# EAGLE board ControlBoard_V1.2 (EAGLE 6.2)
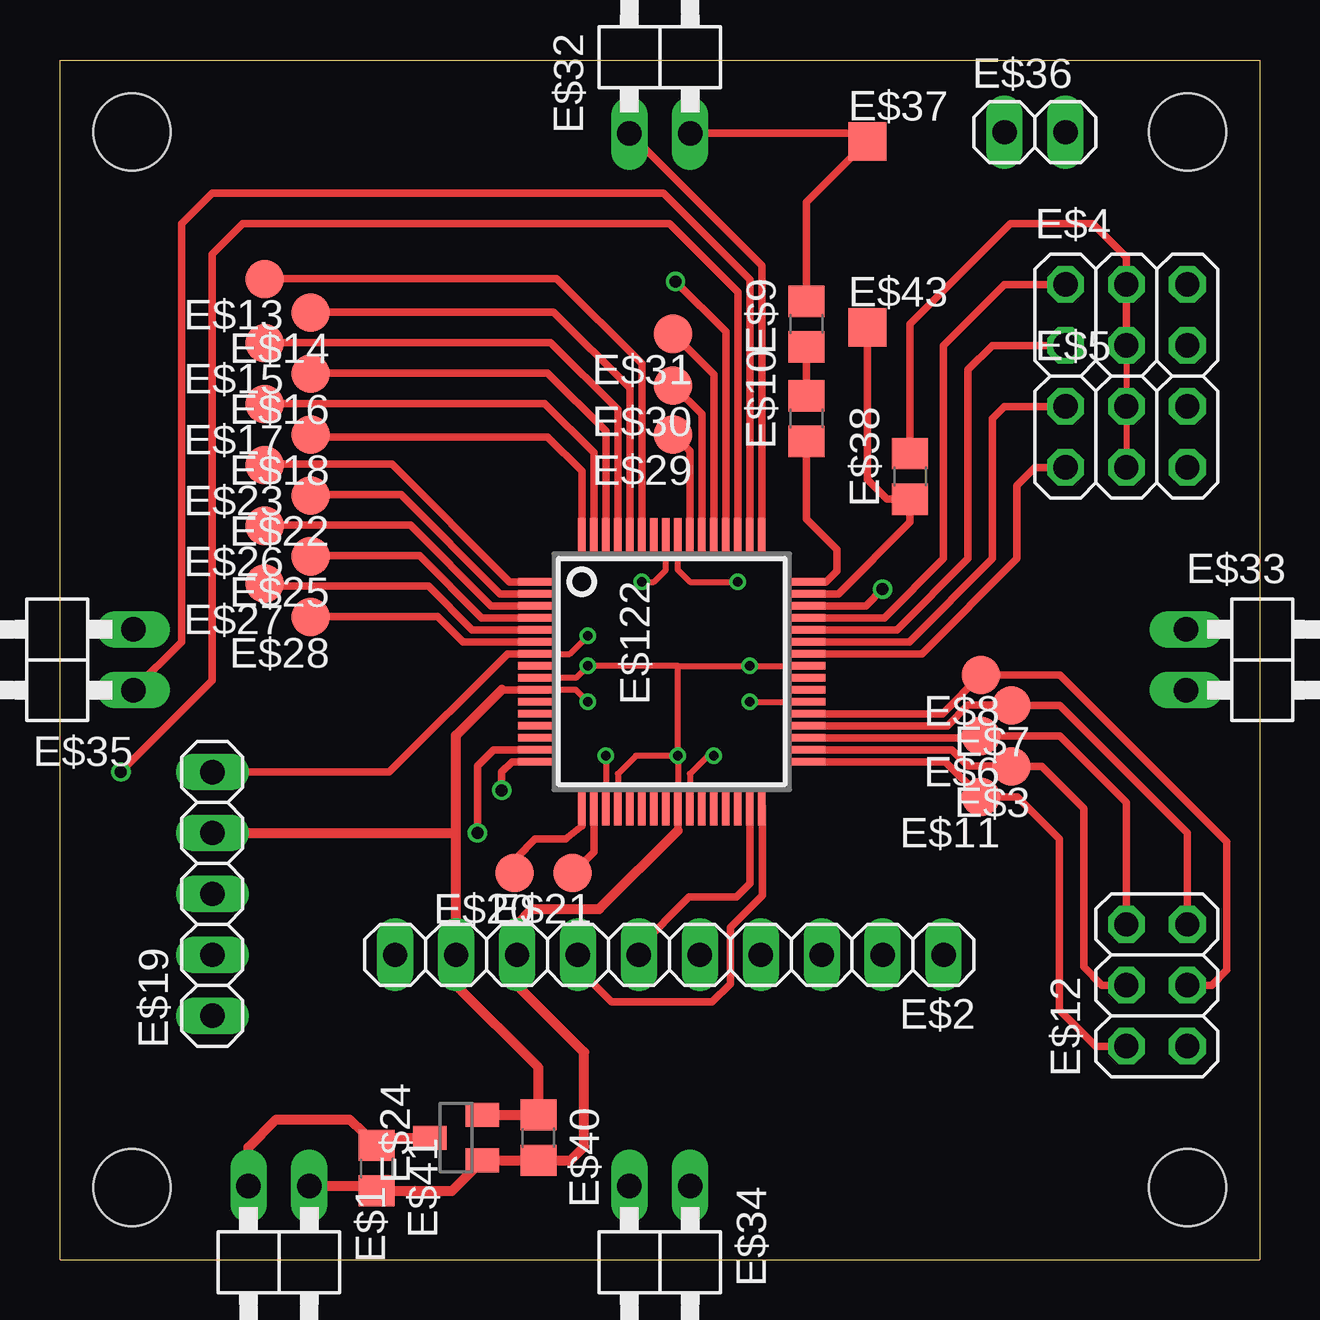
[diagram p0: board, top side]
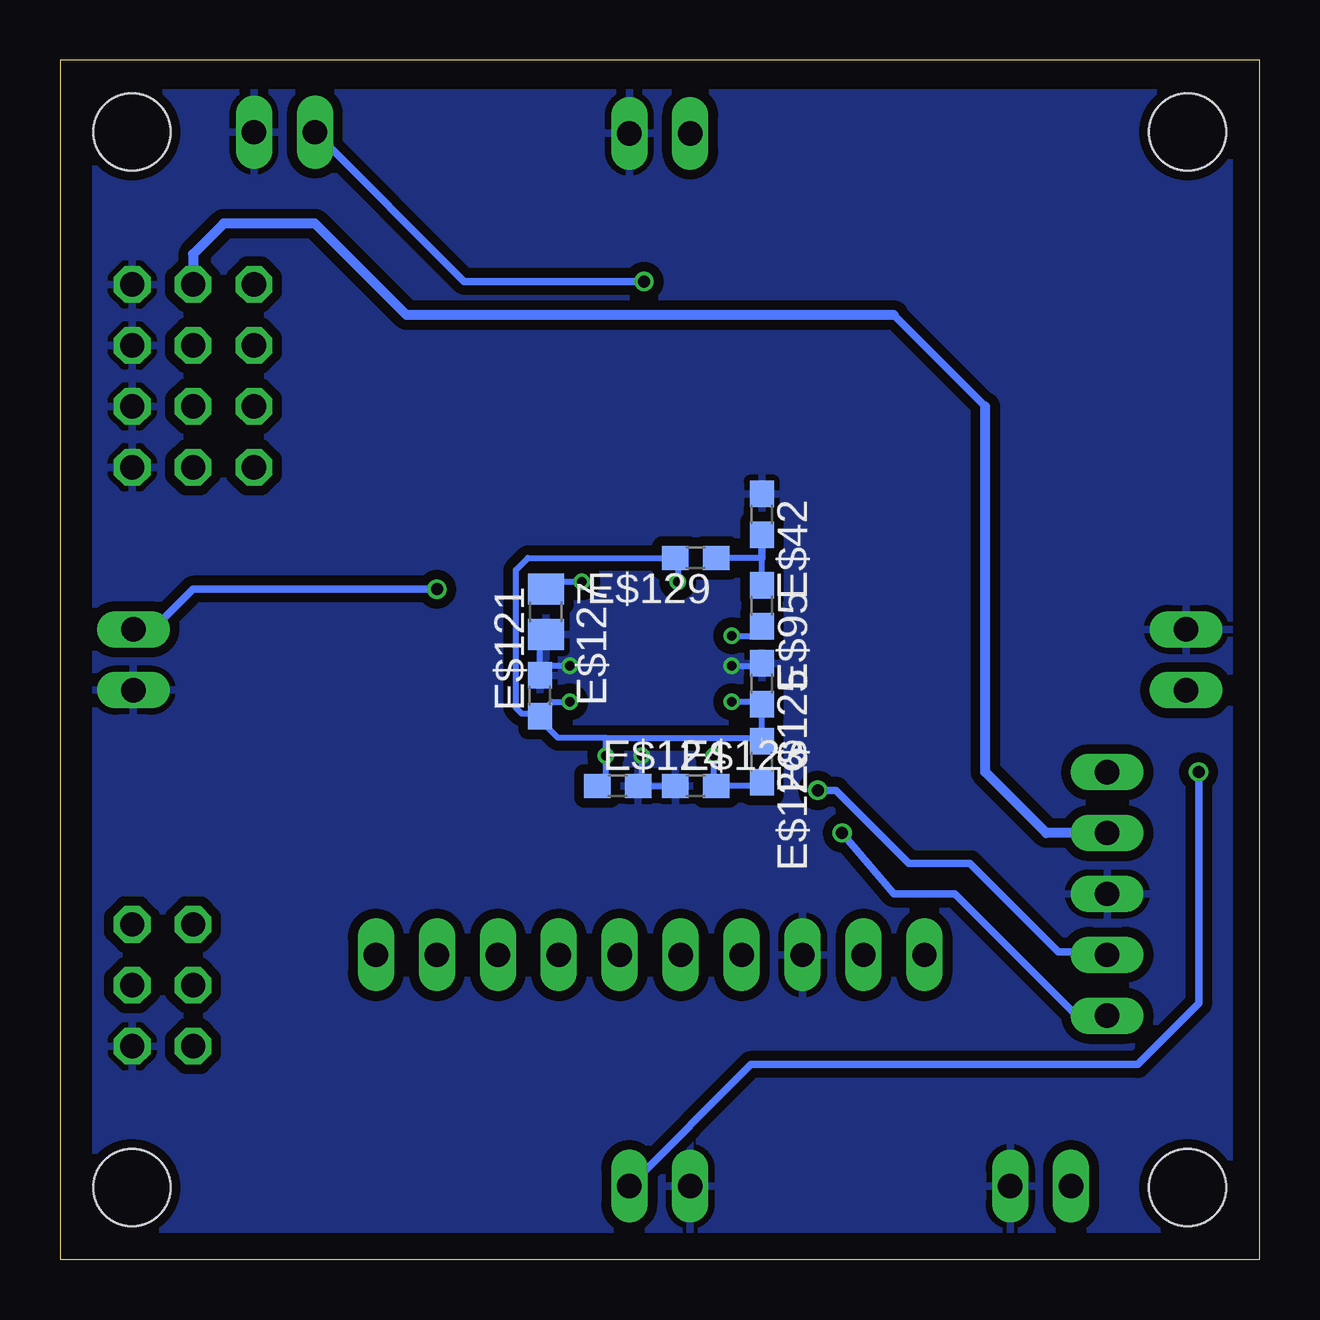
[diagram p1: board, bottom side, seen from below]

Size 50 x 50 mm. Coordinates in mm from the lower left corner, seen from the top.
Outline: 0,0 0,50 50,50 50,0 0,0
Copper layers (1*16): Top 0.035mm / dielectric 1.5mm / Bottom 0.035mm
Design rules: minimum track width 6mil, minimum drill 12mil, track to track 6mil, track to pad 6mil, pad to pad 6mil, via to via 6mil, smd to smd 0mil, copper to edge 10mil, drill to drill 10mil, minimum pad ring 10mil, minimum via ring 6mil, stop-mask expansion 2mil, vias tented up to drill 100mil, thermal gap 10mil
Holes 3.2 mm at 3,3 3,47 47,47 47,3

## Footprints (pad centres in the part's own frame; a part is rotated, then mirrored left to right if it is on the bottom)
1X02/90 = drill 1.016 long: 1 -1.27,-3.81; 2 1.27,-3.81
1X10 = drill 1.016 long: 1 -11.43,0; 2 -8.89,0; 3 -6.35,0; 4 -3.81,0; 5 -1.27,0; 6 1.27,0; 7 3.81,0; 8 6.35,0; 9 8.89,0; 10 11.43,0
TP16R = smd 1.6 x 1.6: TP 0,0
2X03 = drill 1.016 octagon: 1 -2.54,-1.27; 2 -2.54,1.27; 3 0,-1.27; 4 0,1.27; 5 2.54,-1.27; 6 2.54,1.27
C0805 = smd 1.3 x 1.5: 1 -0.95,0; 2 0.95,0
1X05 = drill 1.016 long: 1 -5.08,0; 2 -2.54,0; 3 0,0; 4 2.54,0; 5 5.08,0
SOT23 = smd 1 x 1.4: 1 -0.95,-1.1; 2 0.95,-1.1; 3 0,1.1
1X02 = drill 1.016 long: 1 -1.27,0; 2 1.27,0
TP16SQ = smd 1.6 x 1.6: TP 0,0
C0603 = smd 1.1 x 1: 1 -0.85,0; 2 0.85,0
SQFP-S-10X10-64 = smd 0.3 x 1.6: 1 -3.75,-5.6; 2 -3.25,-5.6; 3 -2.75,-5.6; 4 -2.25,-5.6; 5 -1.75,-5.6; 6 -1.25,-5.6; 7 -0.75,-5.6; 8 -0.25,-5.6; 9 0.25,-5.6; 10 0.75,-5.6; 11 1.25,-5.6; 12 1.75,-5.6; 13 2.25,-5.6; 14 2.75,-5.6; 15 3.25,-5.6; 16 3.75,-5.6; 33 3.75,5.6; 34 3.25,5.6; 35 2.75,5.6; 36 2.25,5.6; 37 1.75,5.6; 38 1.25,5.6; 39 0.75,5.6; 40 0.25,5.6; 41 -0.25,5.6; 42 -0.75,5.6; 43 -1.25,5.6; 44 -1.75,5.6; 45 -2.25,5.6; 46 -2.75,5.6; 47 -3.25,5.6; 48 -3.75,5.6 | smd 1.6 x 0.3: 17 5.6,-3.75; 18 5.6,-3.25; 19 5.6,-2.75; 20 5.6,-2.25; 21 5.6,-1.75; 22 5.6,-1.25; 23 5.6,-0.75; 24 5.6,-0.25; 25 5.6,0.25; 26 5.6,0.75; 27 5.6,1.25; 28 5.6,1.75; 29 5.6,2.25; 30 5.6,2.75; 31 5.6,3.25; 32 5.6,3.75; 49 -5.6,3.75; 50 -5.6,3.25; 51 -5.6,2.75; 52 -5.6,2.25; 53 -5.6,1.75; 54 -5.6,1.25; 55 -5.6,0.75; 56 -5.6,0.25; 57 -5.6,-0.25; 58 -5.6,-0.75; 59 -5.6,-1.25; 60 -5.6,-1.75; 61 -5.6,-2.25; 62 -5.6,-2.75; 63 -5.6,-3.25; 64 -5.6,-3.75

## Placement (x,y rotation side)
E$1  [1X02/90]  9.12,-0.75 180 top
E$2  [1X10]  25.4,12.7 180 top
E$3  [TP16R]  39.66,20.55 180 top
E$4  [2X03]  44.45,39.37 0 top
E$5  [2X03]  44.45,34.29 0 top
E$6  [TP16R]  38.38,21.82 180 top
E$7  [TP16R]  39.66,23.09 180 top
E$8  [TP16R]  38.38,24.36 180 top
E$9  [C0805]  31.11,38.99 90 top
E$10  [C0805]  31.11,35.05 90 top
E$11  [TP16R]  38.38,19.28 180 top
E$12  [2X03]  45.72,11.43 90 top
E$13  [TP16R]  8.54,40.87 180 top
E$14  [TP16R]  10.45,39.47 180 top
E$15  [TP16R]  8.54,38.2 180 top
E$16  [TP16R]  10.45,36.93 180 top
E$17  [TP16R]  8.54,35.66 180 top
E$18  [TP16R]  10.45,34.39 180 top
E$19  [1X05]  6.35,15.24 90 top
E$20  [TP16R]  18.95,16.11 180 top
E$21  [TP16R]  21.37,16.11 180 top
E$22  [TP16R]  10.45,31.85 180 top
E$23  [TP16R]  8.54,33.12 180 top
E$24  [SOT23]  16.51,5.08 90 top
E$25  [TP16R]  10.45,29.31 180 top
E$26  [TP16R]  8.54,30.58 180 top
E$27  [TP16R]  8.54,28.17 180 top
E$28  [TP16R]  10.45,26.77 180 top
E$29  [TP16R]  25.56,34.39 180 top
E$30  [TP16R]  25.56,36.42 180 top
E$31  [TP16R]  25.56,38.58 180 top
E$32  [1X02/90]  25,50.75 0 top
E$33  [1X02/90]  50.75,25 270 top
E$34  [1X02/90]  25,-0.75 180 top
E$35  [1X02/90]  -0.75,25 90 top
E$36  [1X02]  40.64,46.99 0 top
E$37  [TP16SQ]  33.66,46.61 0 top
E$38  [C0805]  35.43,32.64 90 top
E$40  [C0805]  19.94,5.08 270 top
E$41  [C0805]  13.21,3.81 270 top
E$42  [C0603]  20.75,31.06 270 bottom
E$43  [TP16SQ]  33.66,38.86 0 top
E$95  [C0603]  20.75,27.25 270 bottom
E$121  [C0603]  30,23.5 90 bottom
E$122  [SQFP-S-10X10-64]  25.5,24.5 270 top
E$123  [C0603]  23.5,19.75 0 bottom
E$124  [C0603]  26.75,19.75 0 bottom
E$125  [C0603]  20.75,24 270 bottom
E$126  [C0603]  20.75,20.75 270 bottom
E$127  [C0805]  29.75,27 270 bottom
E$129  [C0603]  23.5,29.25 180 bottom

## Library data of the parts
E$1 E$2 E$4 E$5 E$12 E$19 E$32-E$36 = pinhead
E$3 E$6-E$8 E$11 E$13-E$18 E$20-E$23 E$25-E$31 E$37 E$43 = testpad
E$9 E$10 E$24 E$38 E$40-E$42 E$95 E$121-E$127 E$129 = smd-ipc

## Nets
S$1: E$2.6 E$122.31
S$3: E$2.7 E$122.32
S$4: E$11.TP E$12.2 E$122.33
S$5: E$3.TP E$12.4 E$122.34
S$6: E$122.56 E$127.1
S$7: E$6.TP E$12.6 E$122.35
S$8: E$7.TP E$12.5 E$122.36
S$10: E$8.TP E$12.3 E$122.37
S$11: E$19.5 E$95.2 E$122.7
S$12: E$42.2 E$95.1 E$129.1
S$14: E$10.1 E$122.48
S$15: E$38.1 E$43.TP E$122.47
S$16: E$4.2 E$122.45
S$18: E$4.1 E$122.44
S$19: E$5.2 E$122.43
S$20: E$5.1 E$122.42
S$21: E$33.1 E$122.46
S$22: E$32.1 E$122.49
S$23: E$35.1 E$122.50
S$24: E$34.1 E$122.51
S$25: E$1.2 E$24.3 E$41.1
S$26: E$20.TP E$122.17
S$27: E$122.11
S$28: E$9.1 E$10.2
S$29: E$21.TP E$122.18
S$30: E$19.1 E$122.15
S$31: E$25.TP E$122.4
S$32: E$2.4
S$33: E$27.TP E$122.5
S$34: E$28.TP E$122.6
S$35: E$18.TP E$122.64
S$36: E$17.TP E$122.63
S$37: E$16.TP E$122.62
S$38: E$15.TP E$122.61
S$39: E$14.TP E$122.60
S$40: E$13.TP E$122.59
S$41: E$19.2 E$122.16
S$42: E$23.TP E$122.1
S$43: E$22.TP E$122.2
S$44: E$26.TP E$122.3
S$45: E$29.TP E$122.55
S$46: E$30.TP E$122.54
S$47: E$31.TP E$122.53
S$48: E$36.1 E$122.52
S$49: E$1.1 E$2.8 E$4.5 E$4.6 E$5.5 E$5.6 E$9.2 E$12.1 E$19.3 E$24.1 E$32.2 E$33.2 E$34.2 E$35.2 E$36.2 E$37.TP E$40.2 E$41.2 E$42.1 E$121.2 E$122.9 E$122.20 E$122.25 E$122.41 E$123.1 E$124.2 E$125.1 E$127.2
S$179: E$122.19 E$123.2 E$126.2
VCC: E$2.9 E$4.3 E$4.4 E$5.3 E$5.4 E$19.4 E$24.2 E$38.2 E$40.1 E$121.1 E$122.10 E$122.26 E$122.38 E$122.57 E$124.1 E$125.2 E$126.1 E$129.2

## Tracks (layer width: path | path; a pad name or v marks a point on that pad's centre or on a via)
S$1
  Top 0.305: E$2.6 24.13,13.02 26.23,15.11 28.19,15.11 28.77,15.68 28.77,18.73 E$122.31
S$3
  Top 0.305: E$2.7 21.59,12.13 22.99,10.73 27.18,10.73 27.94,11.49 27.94,13.84 29.27,15.18 29.27,18.86 E$122.32
S$4
  Top 0.305: E$122.33 36.91,20.75 E$11.TP 39.9,19.28 41.66,17.53 41.66,10.41 43.18,8.89 E$12.2
S$5
  Top 0.305: E$122.34 37.17,21.25 37.85,20.57 39.12,20.57 E$3.TP 40.92,20.55 42.67,18.8 42.67,12.19 43.43,11.43 E$12.4
S$6  (via drill 0.4)
  Top 0.254: v28.25,28.25 26.25,28.25 25.75,28.75 E$122.56
  Bottom 0.254: E$127.1 29.75,28.25 v28.25,28.25
S$7
  Top 0.305: E$122.35 38.31,21.75 E$6.TP 41.68,21.82 44.45,19.05 E$12.6
S$8
  Top 0.305: E$122.36 36.98,22.25 37.85,23.11 39.38,23.11 E$7.TP 41.68,23.09 46.99,17.78 E$12.5
S$10
  Top 0.305: E$122.37 36.77,22.75 E$8.TP 41.68,24.36 48.64,17.4 48.64,12.06 48.01,11.43 E$12.3
S$11  (via drill 0.4)
  Top 0.254: v22,26 21.25,25.25 E$122.7
  Top 0.305: E$122.7 18.65,25.25 13.72,20.32 E$19.5
  Bottom 0.254: v22,26 20.75,26 E$95.2
S$12
  Bottom 0.254: E$95.1 20.75,29 20.75,29.25 E$129.1
  Bottom 0.305: 20.75,28 E$95.1 | 20.75,29.25 20.75,29.96 E$42.2
S$14
  Top 0.305: E$122.48 31.93,28.25 32.38,28.7 32.38,29.59 31.11,30.86 E$10.1
S$15
  Top 0.305: E$122.47 32.45,27.75 35.43,30.73 E$38.1 34.48,31.69 33.66,32.51 E$43.TP
S$16
  Top 0.305: E$122.45 34.37,26.75 36.83,29.21 36.83,38.1 39.37,40.64 E$4.2
S$18
  Top 0.305: E$122.44 34.89,26.25 37.85,29.21 37.85,37.08 38.86,38.1 E$4.1
S$19
  Top 0.305: E$122.43 35.4,25.75 38.86,29.21 38.86,35.05 39.37,35.56 E$5.2
S$20
  Top 0.305: E$122.42 35.92,25.25 39.88,29.21 39.88,32.26 40.64,33.02 E$5.1
S$21  (via drill 0.5)
  Top 0.305: E$122.46 33.6,27.25 v34.29,27.94
  Bottom 0.305: v34.29,27.94 44.45,27.94 46.18,26.21 E$33.1
S$22
  Top 0.305: E$122.49 29.25,41.42 E$32.1
S$23
  Top 0.305: E$122.50 28.75,40.85 25.15,44.45 6.35,44.45 5.08,43.18 5.08,25.75 E$35.1
S$24  (via drill 0.5)
  Top 0.305: E$122.51 28.25,40.33 25.4,43.18 7.62,43.18 6.35,41.91 6.35,24.13 v2.54,20.32
  Bottom 0.305: v2.54,20.32 2.54,10.67 5.08,8.13 21.2,8.13 E$34.1
S$25
  Top 0.406: E$1.2 7.86,4.68 9.02,5.84 12.06,5.84 E$41.1 13.53,5.08 E$24.3
S$26
  Top 0.305: E$122.17 21.75,18.07 21.08,17.53 19.81,17.53 19.05,16.76 19.18,16.58 E$20.TP
S$27
  Top 0.305: 19.76,23.24 E$122.11
S$28
  Top 0.305: E$10.2 E$9.1
S$29
  Top 0.305: E$122.18 22.25,16.99 E$21.TP
S$30  (via drill 0.5)
  Top 0.305: E$122.15 18.07,21.25 17.4,20.57 v17.4,17.78
  Bottom 0.305: v17.4,17.78 15.24,15.24 12.7,15.24 7.62,10.16 E$19.1
S$31
  Top 0.305: E$122.4 17.57,26.75 14.99,29.34 10.47,29.34 E$25.TP
S$32
  Bottom 0.305: 29.08,12.7 29.21,12.83 E$2.4
S$33
  Top 0.305: E$122.5 17.18,26.25 15.37,28.07 8.64,28.07 E$27.TP
S$34
  Top 0.305: E$122.6 16.8,25.75 15.75,26.8 10.47,26.8 E$28.TP
S$35
  Top 0.305: E$122.64 21.75,32.86 20.32,34.29 10.55,34.29 E$18.TP
S$36
  Top 0.305: E$122.63 22.25,33.63 20.19,35.69 8.69,35.69 E$17.TP
S$37
  Top 0.305: E$122.62 22.75,34.53 20.32,36.96 10.47,36.96 E$16.TP
S$38
  Top 0.305: E$122.61 23.25,35.42 20.45,38.23 8.56,38.23 E$15.TP
S$39
  Top 0.305: E$122.60 23.75,36.32 20.57,39.5 10.47,39.5 E$14.TP
S$40
  Top 0.305: E$122.59 24.25,37.34 20.7,40.89 8.56,40.89 E$13.TP
S$41  (via drill 0.5)
  Top 0.305: E$122.16 18.84,20.75 18.41,20.32 v18.41,19.56
  Bottom 0.305: v18.41,19.56 17.65,19.56 14.61,16.51 12.06,16.51 8.38,12.83 6.48,12.83 E$19.2
S$42
  Top 0.305: E$122.1 18.74,28.25 13.84,33.15 8.56,33.15 E$23.TP
S$43
  Top 0.305: E$122.2 18.35,27.75 14.22,31.88 10.47,31.88 E$22.TP
S$44
  Top 0.305: E$122.3 17.96,27.25 14.61,30.61 8.56,30.61 E$26.TP
S$45
  Top 0.305: E$122.55 26.25,33.7 E$29.TP
S$46
  Top 0.305: E$122.54 26.75,35.23 E$30.TP
S$47
  Top 0.305: E$122.53 27.25,36.89 E$31.TP
S$48  (via drill 0.5)
  Top 0.305: E$122.52 27.75,38.67 v25.65,40.77
  Bottom 0.305: v25.65,40.77 33.15,40.77 E$36.1
S$49  (via drill 0.4)
  Top 0.254: E$122.9 21.5,24.25 v22,24.75 25.75,24.75 | E$122.20 23.25,20.25 24,21 v25.75,21 | E$122.41 v28.75,24.75 25.75,24.75 | v25.75,21 E$122.25 | v25.75,21 25.75,24.75
  Top 0.305: E$122.25 25.75,17.88 | E$32.2 33.58,46.94 33.28,46.23 E$37.TP 31.11,44.07 E$9.2
  Top 0.406: 25.75,17.88 22.48,14.61 19.68,14.61 19.05,13.97 E$2.8 19.05,11.43 21.84,8.64 21.84,4.7 21.27,4.13 E$40.2 E$24.1 16.34,2.86 E$41.2 13.01,3.06 E$1.1
  Bottom 0.254: E$127.2 30,26.25 30,24.75 | 30,24.75 E$121.2 | E$125.1 20.75,24.75 v22,24.75 | v28.75,24.75 30,24.75 | v25.75,21 25.75,19.85 E$124.2 E$123.1
  Bottom 0.61: 26,19.75 E$124.2
  pour Bottom (isolate 0.406): 1.27,1.27 48.51,1.27 48.51,48.64 1.27,48.64
S$179  (via drill 0.4)
  Top 0.254: v22.75,21 E$122.19
  Bottom 0.254: v22.75,21 22.75,19.85 E$123.2 20.75,19.75 E$126.2
VCC  (via drill 0.4)  (1 unrouted)
  Top 0.254: E$122.57 25.25,28.75 24.75,28.25 v24.25,28.25 | v28.75,23.25 E$122.38 | E$122.26 26.25,20.25 27,21 v27.25,21 | v22,23.25 21.5,23.75 E$122.10 | E$4.3 E$5.4 E$5.3
  Top 0.305: E$38.2 35.43,38.99 39.62,43.18 43.05,43.18 44.45,41.78 E$4.4 E$4.3 | E$122.10 18.42,23.75
  Top 0.406: 18.42,23.75 16.51,21.84 16.51,17.78 | 16.51,12.67 16.51,12.19 16.51,11.43 19.94,8 E$40.1 E$24.2 | 16.51,12.67 16.51,17.78 | E$19.4 16.51,17.78 | E$2.9 16.51,12.67
  Bottom 0.254: v24.25,28.25 24.25,29.25 E$129.2 30.5,29.25 31,28.75 31,23 30.75,22.75 30,22.75 | v28.75,23.25 29.5,23.25 30,22.75 | 30,22.75 E$121.1 30,22.5 29.25,21.75 27.25,21.75 | E$124.1 27.25,20.15 v27.25,21 27.25,21.75 | 27.25,21.75 20.75,21.75 | E$126.1 E$125.2 20.75,23.25 v22,23.25
  Bottom 0.305: 11.43,35.56 15.24,39.37
  Bottom 0.406: E$19.4 8.89,17.78 11.43,20.32 11.43,35.56 | 15.24,39.37 35.56,39.37 39.37,43.18 43.18,43.18 44.45,41.91 E$4.4
  Bottom 0.61: 27.75,19.75 E$124.1

## Text on the board
Document: Quad V1.0 | SIG | GND | SIG | M1 | GND | BUT | AIL | ELE | THR | LED | RUD | SIG | VDD | GND | GND | SIG | M2 | SCL | M3 | SIG | GND | M | + | RTS | SDA | - | D | RX | C | VccIN | Vcc3.3 | GND | SCL | SDA | M_DRdy | A_Int1 | T_Int1 | P_XClr | P_EOC | TX | GND | POW | M4 | SIG | + | - | GND | 53686